# EAGLE board PCB_heater_mini_v1.0 (EAGLE 6.4)
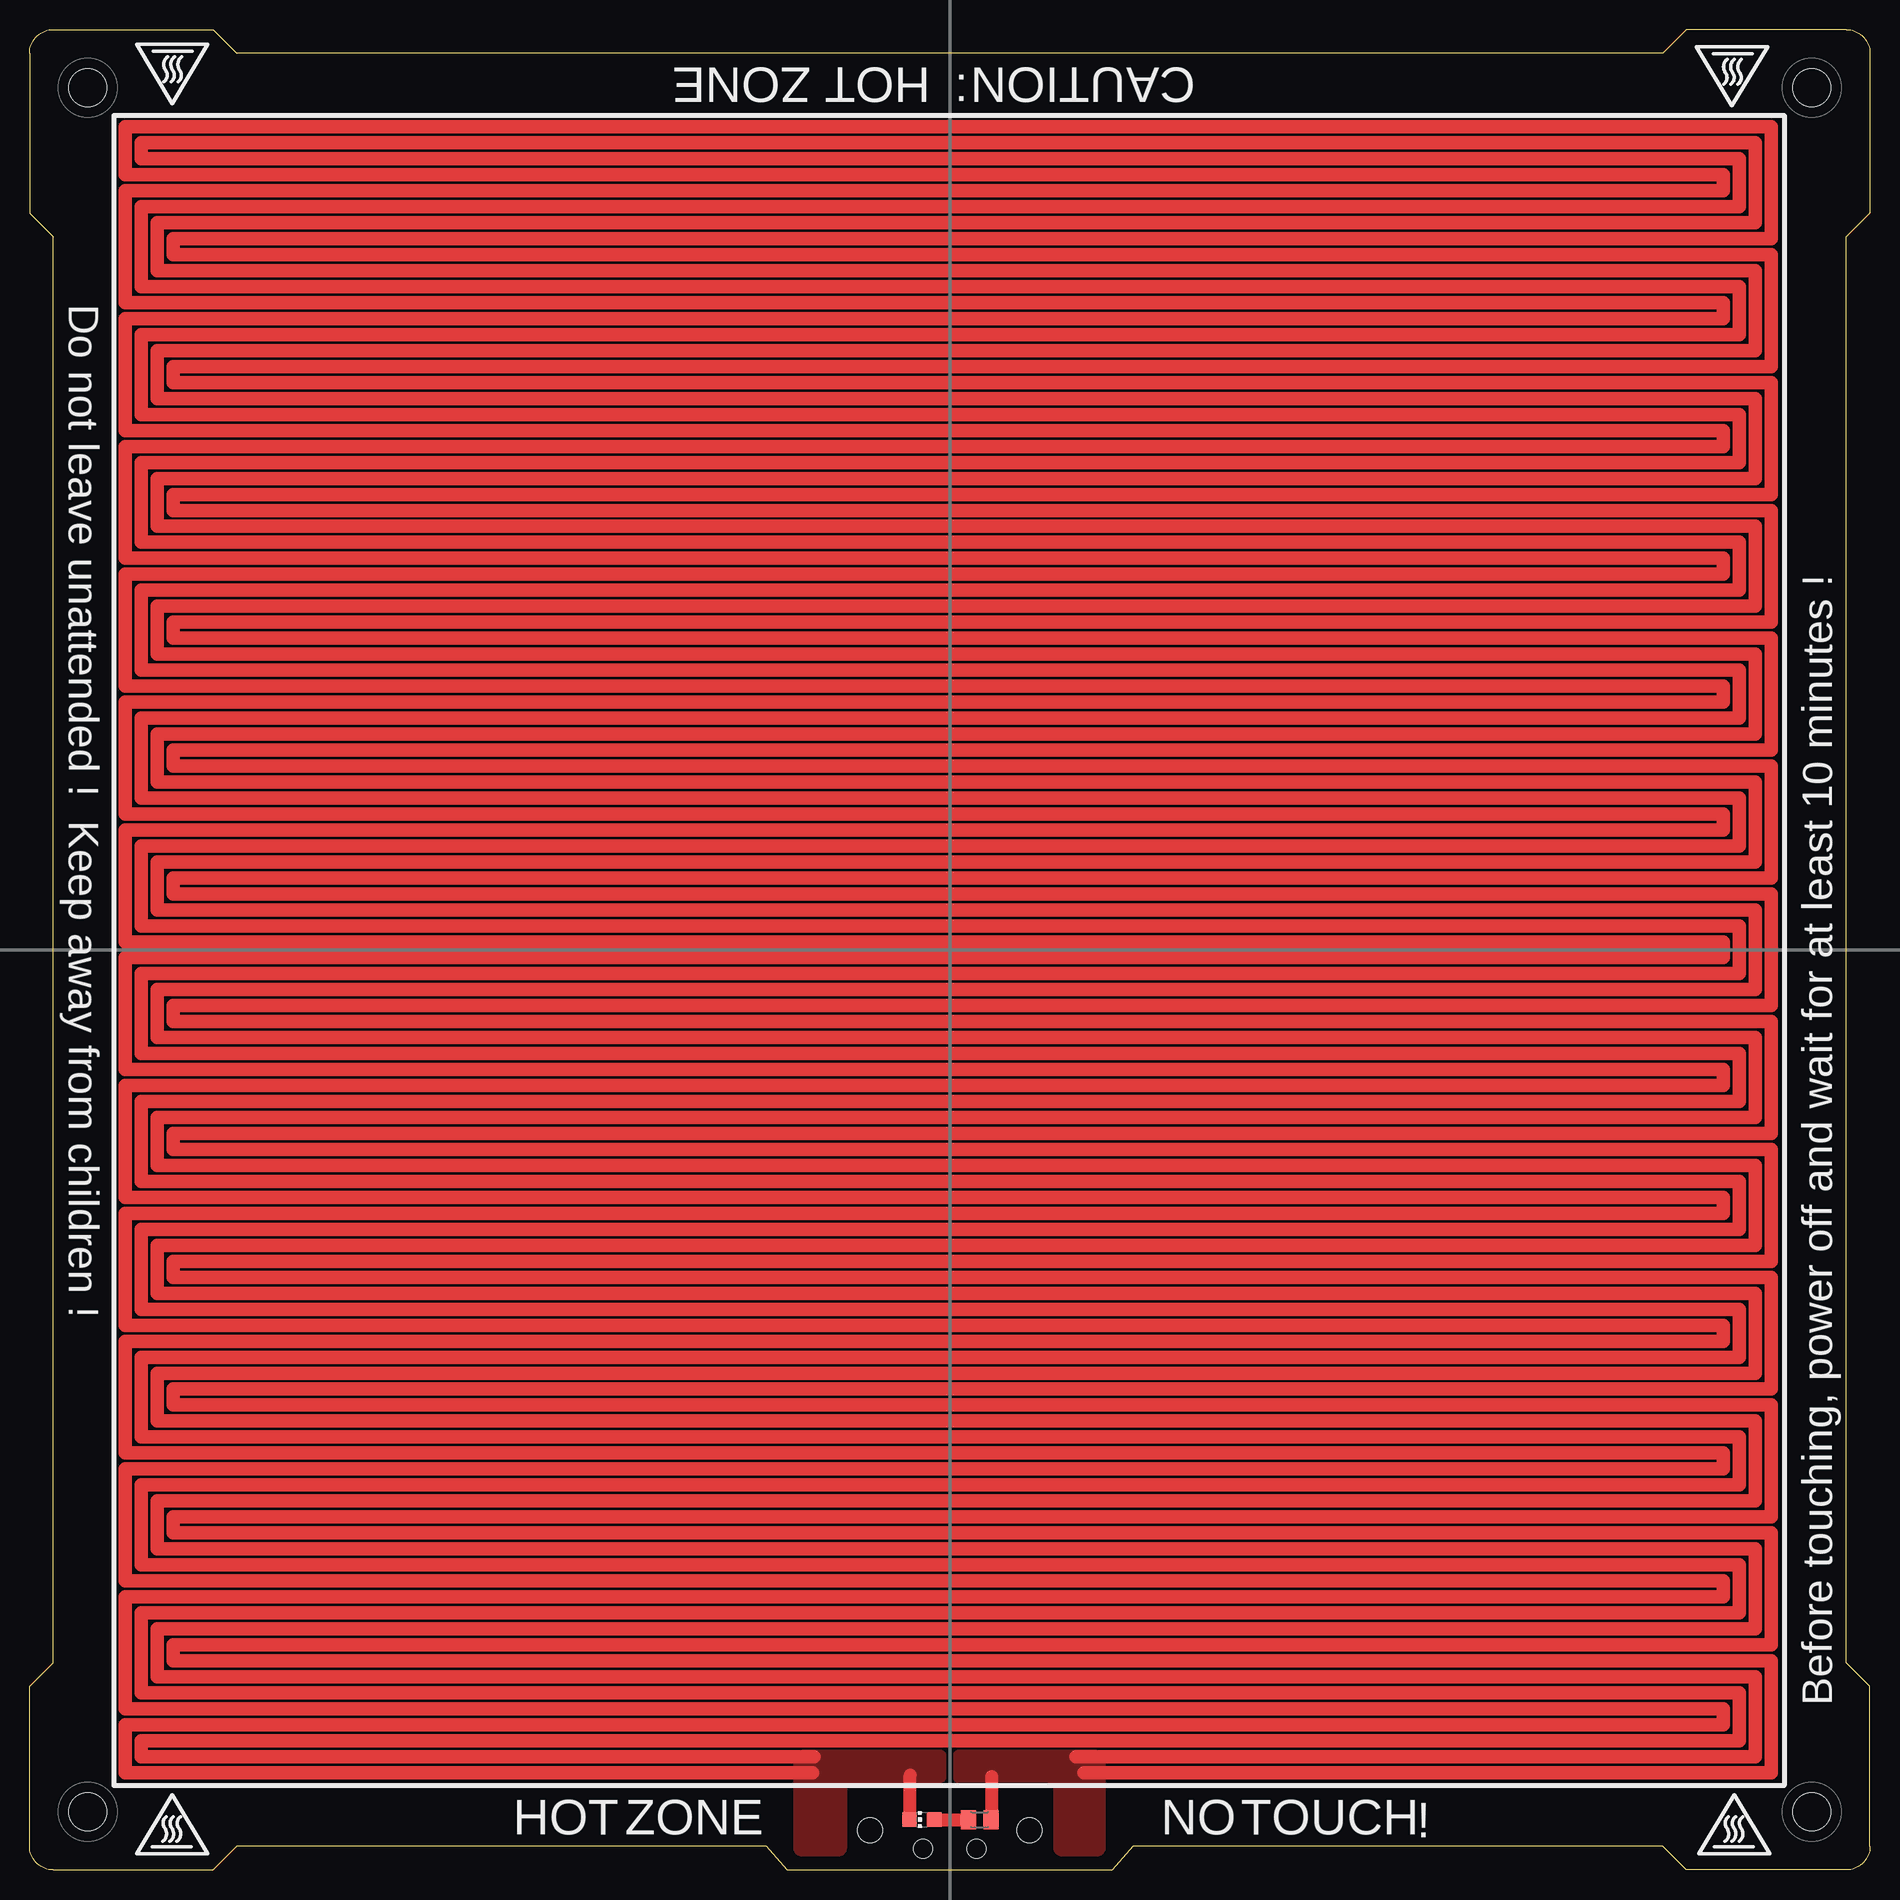
[diagram p0: board, top side]
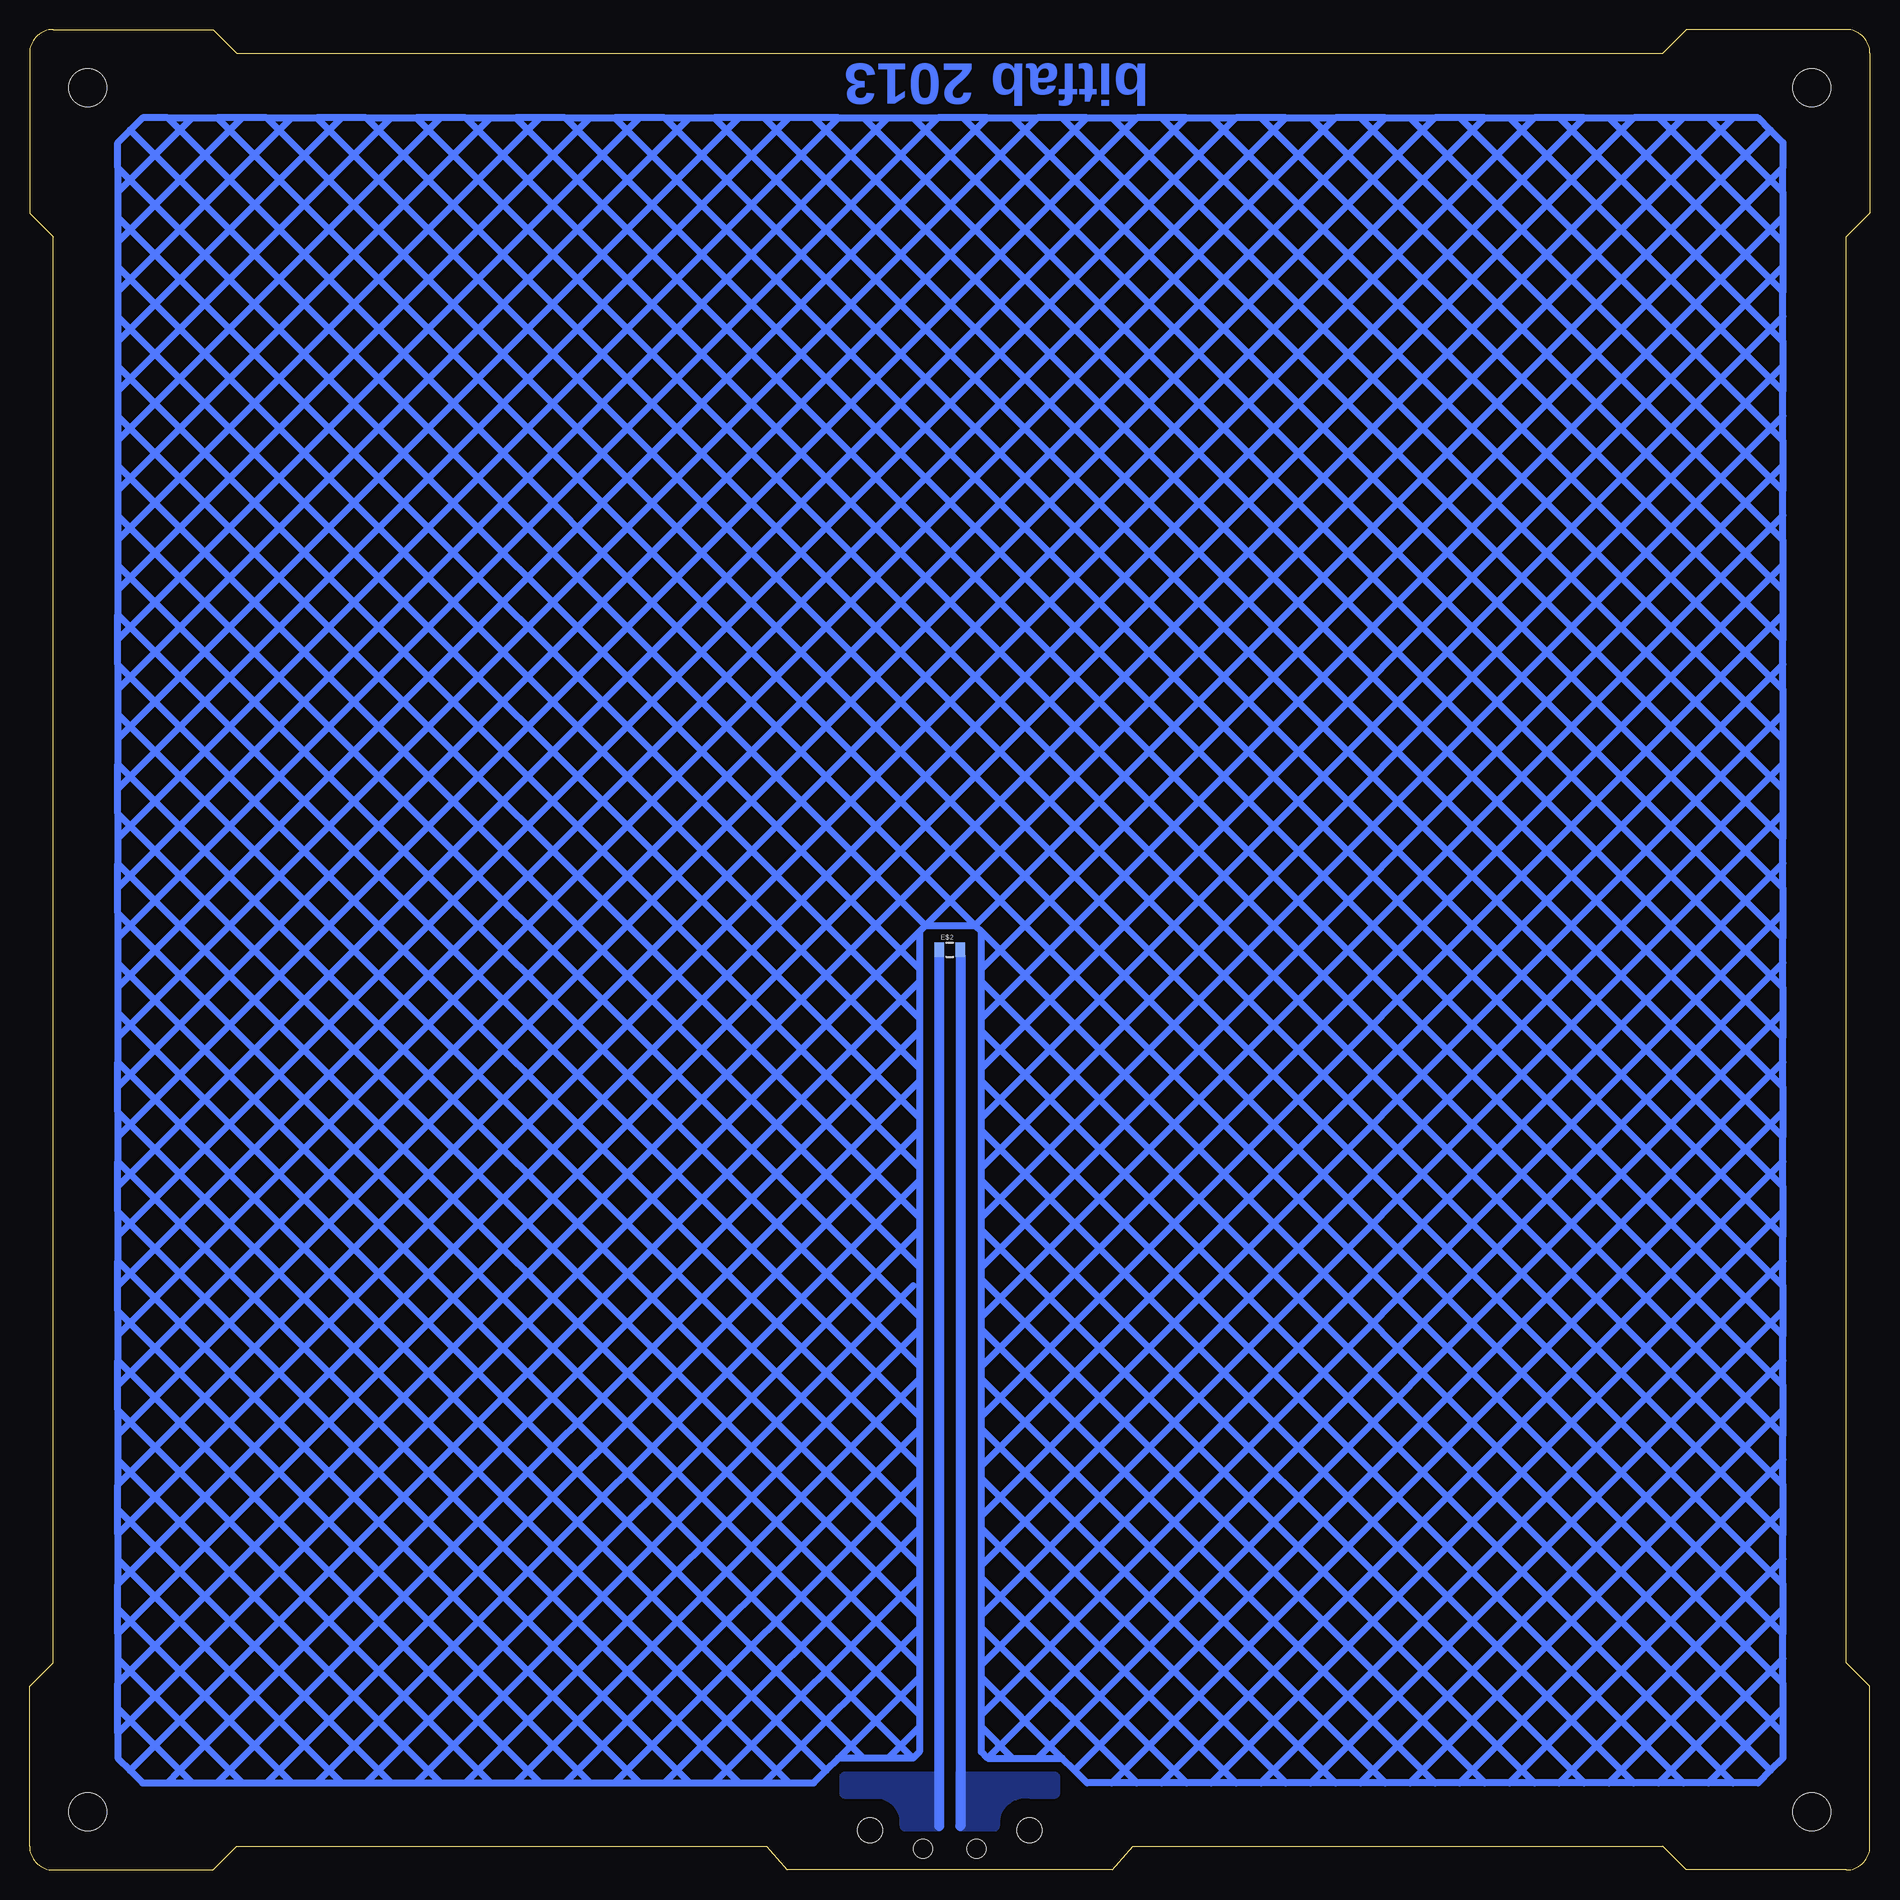
[diagram p1: board, bottom side, seen from below]

Size 155.5 x 155.5 mm. Coordinates in mm from the lower left corner, seen from the top.
Outline: 153.5,17.5 153.5,138 155.5,140 155.5,153.5 arc90 153.5,155.5 140,155.5 138,153.5 17.5,153.5 15.5,155.5 2,155.5 arc90 0,153.5 0,140 2,138 2,17.5 0,15.5 0,2 arc90 2,0 15.5,0 17.5,2 62.25,2 64,0 91.5,0 93.25,2 138,2 140,0 153.5,0 arc90 155.5,2 155.5,15.5 153.5,17.5
Copper layers (1*16): Top 0.035mm / dielectric 1.5mm / Bottom 0.035mm
Design rules "default": minimum track width 10mil, minimum drill 24mil, track to track 8mil, track to pad 8mil, pad to pad 8mil, via to via 8mil, smd to smd 8mil, copper to edge 20mil, drill to drill 8mil, minimum pad ring 10mil, minimum via ring 8mil, stop-mask expansion 4mil, vias tented up to drill 0mil, thermal gap 10mil
Holes 3.2 mm at 4.9,4.9 150.6,4.9 4.9,150.6 150.6,150.6
Holes 2.1 mm at 71,3.35 84.5,3.35
Holes 1.6 mm at 75.5,1.8 80,1.8

## Footprints (pad centres in the part's own frame; a part is rotated, then mirrored left to right if it is on the bottom)
M0805 = smd 1.3 x 1.6: 1 -0.95,0; 2 0.95,0
0805 = smd 0.8 x 1.2: 1 -0.9,0; 2 0.9,0
CHIP-LED0805 = smd 1.2 x 1.2: A 0,-1.05; C 0,1.05

## Placement (x,y rotation side)
1K  [M0805]  80.28,4.25 180 top
E$2  [0805]  77.75,77.75 0 bottom
LED1  [CHIP-LED0805]  75.39,4.25 90 top

## Library data of the parts
1K = resistor
E$2 = SparkFun
LED1 = led

## Nets
N$2: 1K.1

## Tracks (layer width: path | path; a pad name or v marks a point on that pad's centre or on a via)
S$1
  Top 1.1: 74.4,4.3 74.4,8 | 81.3,4.3 81.3,7.9
  Top 1.15: 89.1,8.22 147.15,8.22 147.15,17.68 12.15,17.68 12.15,19.02 147.15,19.02 147.15,28.48 12.15,28.48 12.15,29.82 147.15,29.82 147.15,39.27 12.15,39.27 12.15,40.62 147.15,40.62 147.15,50.08 12.15,50.08 12.15,51.42 147.15,51.42 147.15,60.88 12.15,60.88 12.15,62.23 147.15,62.23 147.15,71.67 12.15,71.67 12.15,73.03 147.15,73.03 147.15,82.47 12.15,82.47 12.15,83.83 147.15,83.83 147.15,93.28 12.15,93.28 12.15,94.62 147.15,94.62 147.15,104.08 12.15,104.08 12.15,105.42 147.15,105.42 147.15,114.88 12.15,114.88 12.15,116.22 147.15,116.22 147.15,125.67 12.15,125.67 12.15,127.03 147.15,127.03 147.15,136.47 12.15,136.47 12.15,137.82 147.15,137.82 147.15,147.28 8.1,147.28 8.1,143.22 143.1,143.22 143.1,141.88 8.1,141.88 8.1,132.43 143.1,132.43 143.1,131.07 8.1,131.07 8.1,121.62 143.1,121.62 143.1,120.28 8.1,120.28 8.1,110.83 143.1,110.83 143.1,109.47 8.1,109.47 8.1,100.03 143.1,100.03 143.1,98.67 8.1,98.67 8.1,89.22 143.1,89.22 143.1,87.88 8.1,87.88 8.1,78.42 143.1,78.42 143.1,77.08 8.1,77.08 8.1,67.62 143.1,67.62 143.1,66.28 8.1,66.28 8.1,56.83 143.1,56.83 143.1,55.48 8.1,55.48 8.1,46.02 143.1,46.02 143.1,44.67 8.1,44.67 8.1,35.23 143.1,35.23 143.1,33.88 8.1,33.88 8.1,24.43 143.1,24.43 143.1,23.07 8.1,23.07 8.1,13.62 143.1,13.62 143.1,12.28 8.1,12.28 8.1,8.22 66.15,8.22 | 88.42,9.57 145.8,9.57 145.8,16.32 10.8,16.32 10.8,20.38 145.8,20.38 145.8,27.12 10.8,27.12 10.8,31.18 145.8,31.18 145.8,37.92 10.8,37.92 10.8,41.98 145.8,41.98 145.8,48.73 10.8,48.73 10.8,52.77 145.8,52.77 145.8,59.52 10.8,59.52 10.8,63.58 145.8,63.58 145.8,70.33 10.8,70.33 10.8,74.38 145.8,74.38 145.8,81.12 10.8,81.12 10.8,85.17 145.8,85.17 145.8,91.92 10.8,91.92 10.8,95.97 145.8,95.97 145.8,102.72 10.8,102.72 10.8,106.78 145.8,106.78 145.8,113.53 10.8,113.53 10.8,117.58 145.8,117.58 145.8,124.33 10.8,124.33 10.8,128.38 145.8,128.38 145.8,135.12 10.8,135.12 10.8,139.18 145.8,139.18 145.8,145.93 9.45,145.93 9.45,144.57 144.45,144.57 144.45,140.53 9.45,140.53 9.45,133.78 144.45,133.78 144.45,129.72 9.45,129.72 9.45,122.97 144.45,122.97 144.45,118.92 9.45,118.92 9.45,112.17 144.45,112.17 144.45,108.12 9.45,108.12 9.45,101.38 144.45,101.38 144.45,97.33 9.45,97.33 9.45,90.58 144.45,90.58 144.45,86.53 9.45,86.53 9.45,79.78 144.45,79.78 144.45,75.72 9.45,75.72 9.45,68.97 144.45,68.97 144.45,64.92 9.45,64.92 9.45,58.17 144.45,58.17 144.45,54.12 9.45,54.12 9.45,47.38 144.45,47.38 144.45,43.33 9.45,43.33 9.45,36.58 144.45,36.58 144.45,32.52 9.45,32.52 9.45,25.77 144.45,25.77 144.45,21.73 9.45,21.73 9.45,14.97 144.45,14.97 144.45,10.93 9.45,10.93 9.45,9.57 66.28,9.57
  pour Top: 78.45,7.35 85.9,7.35 arc-90 86.5,6.85 86.5,1.85 arc90 87.3,1.15 90.2,1.15 arc90 90.9,1.85 90.9,9.26 arc90 89.9,10.15 78.6,10.15 arc90 78.05,9.71 78.05,7.85 arc90
  pour Top: 64.55,9.26 64.55,1.85 arc90 65.25,1.15 68.35,1.15 arc90 69.05,1.85 69.05,6.85 arc-90 69.45,7.35 76.85,7.35 arc90 77.45,7.85 77.45,9.66 arc90 76.85,10.15 65.45,10.15 arc90
S$3
  Bottom 0.85: 76.85,77.25 76.85,3.7
  pour Bottom: 77.25,8.3 77.25,3.75 arc-90 76.75,3.25 74.03,3.25 arc-90 73.53,3.75 73.53,4.25 arc90 70.97,6.03 68.92,6.03 arc-90 68.42,6.53 68.42,7.8 arc-90 68.92,8.3
S$4
  Bottom 0.85: 78.65,77.25 78.65,3.7
  pour Bottom: 78.25,8.05 78.25,3.75 arc90 78.75,3.25 81.47,3.25 arc90 81.97,3.75 81.97,4 arc-90 84,6.03 86.58,6.03 arc90 87.08,6.53 87.08,7.8 arc90 86.58,8.3 78.75,8.3 arc90
S$7
  Top 1.1: 76.6,4.25 79.1,4.25
S$11
  Bottom 0.6: 127.05,148.05 124.95,148.05 | 124.95,148.05 122.85,148.05 | 122.85,148.05 7.35,32.55 | 148.05,28.35 148.05,30.45 | 148.05,30.45 148.05,32.55 | 148.05,32.55 32.55,148.05 | 118.65,7.35 116.55,7.35 | 116.55,7.35 114.45,7.35 | 79.8,79.8 80.33,79.28 | 79.8,79.8 75.6,79.8 | 75.6,79.8 75.08,79.28 | 80.33,75.08 147,8.4 | 143.85,7.35 145.95,7.35 147,8.4 | 143.85,7.35 142.8,8.4 | 142.8,8.4 80.33,70.88 | 143.85,7.35 141.75,7.35 | 141.75,7.35 139.65,7.35 | 80.33,66.67 139.65,7.35 | 139.65,7.35 137.55,7.35 | 137.55,7.35 135.45,7.35 | 135.45,7.35 80.33,62.48 | 80.33,58.27 131.25,7.35 | 131.25,7.35 129.15,7.35 | 129.15,7.35 127.05,7.35 | 127.05,7.35 80.33,54.08 | 80.85,49.35 122.85,7.35 | 122.85,7.35 120.75,7.35 | 120.75,7.35 118.65,7.35 | 118.65,7.35 80.33,45.67 | 135.45,7.35 133.35,7.35 | 133.35,7.35 131.25,7.35 | 127.05,7.35 124.95,7.35 | 124.95,7.35 122.85,7.35 | 114.45,7.35 80.33,41.48 | 114.45,7.35 112.35,7.35 | 112.35,7.35 110.25,7.35 | 110.25,7.35 80.33,37.27 | 110.25,7.35 108.15,7.35 | 108.15,7.35 106.05,7.35 | 106.05,7.35 80.33,33.08 | 106.05,7.35 103.95,7.35 | 103.95,7.35 101.85,7.35 | 101.85,7.35 80.33,28.88 | 101.85,7.35 99.75,7.35 | 99.75,7.35 97.65,7.35 | 97.65,7.35 80.33,24.68 | 97.65,7.35 95.55,7.35 | 95.55,7.35 93.45,7.35 | 93.45,7.35 80.33,20.48 | 93.45,7.35 91.35,7.35 | 91.35,7.35 89.25,7.35 88.2,8.4 | 88.2,8.4 87.15,9.45 | 87.15,9.45 80.33,16.27 | 80.33,79.28 148.05,11.55 | 148.05,11.55 148.05,9.45 147,8.4 | 79.8,79.8 11.55,148.05 | 148.05,11.55 148.05,13.65 | 148.05,13.65 148.05,15.75 | 148.05,15.75 15.75,148.05 | 11.55,148.05 13.65,148.05 | 13.65,148.05 15.75,148.05 | 75.6,79.8 8.4,147 | 7.35,143.85 7.35,145.95 8.4,147 | 7.35,143.85 75.08,76.12 | 11.55,148.05 9.45,148.05 8.4,147
  Bottom 0.6: 15.75,148.05 17.85,148.05 | 17.85,148.05 19.95,148.05 | 19.95,148.05 148.05,19.95 | 148.05,19.95 148.05,17.85 | 148.05,17.85 148.05,15.75 | 148.05,19.95 148.05,22.05 | 148.05,22.05 148.05,24.15 | 148.05,24.15 24.15,148.05 | 24.15,148.05 22.05,148.05 | 22.05,148.05 19.95,148.05 | 24.15,148.05 26.25,148.05 | 26.25,148.05 28.35,148.05 | 28.35,148.05 148.05,28.35 | 148.05,28.35 148.05,26.25 | 148.05,26.25 148.05,24.15 | 32.55,148.05 30.45,148.05 | 30.45,148.05 28.35,148.05 | 32.55,148.05 34.65,148.05 | 34.65,148.05 36.75,148.05 | 36.75,148.05 148.05,36.75 | 148.05,36.75 148.05,34.65 | 148.05,34.65 148.05,32.55 | 75.6,79.8 143.85,148.05 | 143.85,148.05 141.75,148.05 | 141.75,148.05 139.65,148.05 | 139.65,148.05 7.35,15.75 | 7.35,15.75 7.35,17.85 | 7.35,17.85 7.35,19.95 | 7.35,19.95 135.45,148.05 | 135.45,148.05 137.55,148.05 | 137.55,148.05 139.65,148.05 | 143.85,148.05 145.95,148.05 147,147 | 147,147 79.8,79.8 | 75.08,79.28 7.35,11.55 | 7.35,11.55 7.35,9.45 8.4,8.4 | 8.4,8.4 75.08,75.08 | 80.33,76.12 148.05,143.85 | 148.05,143.85 148.05,145.95 147,147 | 148.05,143.85 148.05,141.75 | 148.05,141.75 148.05,139.65 | 148.05,139.65 80.33,71.92 | 148.05,139.65 148.05,137.55 | 148.05,137.55 148.05,135.45 | 148.05,135.45 80.33,67.72 | 148.05,135.45 148.05,133.35 | 148.05,133.35 148.05,131.25 | 148.05,131.25 80.33,63.52 | 148.05,131.25 148.05,129.15 | 148.05,129.15 148.05,127.05 | 148.05,127.05 80.33,59.33 | 148.05,127.05 148.05,124.95 | 148.05,124.95 148.05,122.85 | 148.05,122.85 80.33,55.12 | 148.05,122.85 148.05,120.75 | 148.05,120.75 148.05,118.65 | 148.05,118.65 80.33,50.92 | 148.05,118.65 148.05,116.55 | 148.05,116.55 148.05,114.45 | 148.05,114.45 80.33,46.73
  Bottom 0.6: 148.05,114.45 148.05,112.35 | 148.05,112.35 148.05,110.25 | 148.05,110.25 80.33,42.52 | 148.05,110.25 148.05,108.15 | 148.05,108.15 148.05,106.05 | 148.05,106.05 80.33,38.33 | 11.55,7.35 9.45,7.35 8.4,8.4 | 11.55,7.35 75.08,70.88 | 11.55,7.35 13.65,7.35 | 13.65,7.35 15.75,7.35 | 15.75,7.35 75.08,66.67 | 15.75,7.35 17.85,7.35 | 17.85,7.35 19.95,7.35 | 19.95,7.35 75.08,62.48 | 19.95,7.35 22.05,7.35 | 22.05,7.35 24.15,7.35 | 24.15,7.35 75.08,58.27 | 24.15,7.35 26.25,7.35 | 26.25,7.35 28.35,7.35 | 28.35,7.35 75.08,54.08 | 28.35,7.35 30.45,7.35 | 30.45,7.35 32.55,7.35 | 32.55,7.35 75.08,49.88 | 32.55,7.35 34.65,7.35 | 34.65,7.35 36.75,7.35 | 36.75,7.35 75.08,45.67 | 36.75,7.35 38.85,7.35 | 38.85,7.35 40.95,7.35 | 40.95,7.35 75.08,41.48 | 40.95,7.35 43.05,7.35 | 43.05,7.35 45.15,7.35 | 45.15,7.35 75.08,37.27 | 45.15,7.35 47.25,7.35 | 47.25,7.35 49.35,7.35 | 49.35,7.35 75.08,33.08 | 49.35,7.35 51.45,7.35 | 51.45,7.35 53.55,7.35 | 53.55,7.35 75.08,28.88 | 53.55,7.35 55.65,7.35 | 55.65,7.35 57.75,7.35 | 57.75,7.35 75.08,24.68 | 57.75,7.35 59.85,7.35 | 59.85,7.35 61.95,7.35 | 61.95,7.35 75.08,20.48 | 61.95,7.35 64.05,7.35 | 64.05,7.35 66.15,7.35 67.2,8.4 | 67.2,8.4 68.25,9.45 | 68.25,9.45 75.08,16.27 | 80.33,34.12 148.05,101.85 | 148.05,101.85 148.05,103.95 | 148.05,103.95 148.05,106.05 | 148.05,101.85 148.05,99.75 | 148.05,99.75 148.05,97.65 | 148.05,97.65 80.33,29.93 | 148.05,97.65 148.05,95.55 | 148.05,95.55 148.05,93.45 | 148.05,93.45 80.33,25.73 | 80.33,21.52 148.05,89.25 | 148.05,89.25 148.05,91.35 | 148.05,91.35 148.05,93.45 | 135.45,148.05 133.35,148.05 | 133.35,148.05 131.25,148.05 | 131.25,148.05 7.35,24.15 | 7.35,24.15 7.35,22.05 | 7.35,22.05 7.35,19.95 | 7.35,15.75 7.35,13.65
  Bottom 0.6: 7.35,13.65 7.35,11.55 | 7.35,24.15 7.35,26.25 | 7.35,26.25 7.35,28.35 | 7.35,28.35 127.05,148.05 | 127.05,148.05 129.15,148.05 | 129.15,148.05 131.25,148.05 | 7.35,32.55 7.35,30.45 | 7.35,30.45 7.35,28.35 | 7.35,32.55 7.35,34.65 | 7.35,34.65 7.35,36.75 | 7.35,36.75 118.65,148.05 | 118.65,148.05 120.75,148.05 | 120.75,148.05 122.85,148.05 | 118.65,148.05 116.55,148.05 | 116.55,148.05 114.45,148.05 | 114.45,148.05 7.35,40.95 | 7.35,40.95 7.35,38.85 | 7.35,38.85 7.35,36.75 | 7.35,40.95 7.35,43.05 | 7.35,43.05 7.35,45.15 | 7.35,45.15 110.25,148.05 | 110.25,148.05 112.35,148.05 | 112.35,148.05 114.45,148.05 | 110.25,148.05 108.15,148.05 | 108.15,148.05 106.05,148.05 | 106.05,148.05 7.35,49.35 | 7.35,49.35 7.35,47.25 | 7.35,47.25 7.35,45.15 | 7.35,49.35 7.35,51.45 | 7.35,51.45 7.35,53.55 | 7.35,53.55 101.85,148.05 | 101.85,148.05 103.95,148.05 | 103.95,148.05 106.05,148.05 | 101.85,148.05 99.75,148.05 | 99.75,148.05 97.65,148.05 | 97.65,148.05 7.35,57.75 | 7.35,57.75 7.35,55.65 | 7.35,55.65 7.35,53.55 | 7.35,57.75 7.35,59.85 | 7.35,59.85 7.35,61.95 | 7.35,61.95 93.45,148.05 | 93.45,148.05 95.55,148.05 | 95.55,148.05 97.65,148.05 | 148.05,89.25 148.05,87.15 | 148.05,87.15 148.05,85.05 | 148.05,85.05 80.33,17.32 | 80.33,13.12 148.05,80.85 | 148.05,80.85 148.05,82.95 | 148.05,82.95 148.05,85.05 | 148.05,80.85 148.05,78.75 | 148.05,78.75 148.05,76.65 | 148.05,76.65 80.85,9.45 | 148.05,76.65 148.05,74.55 | 148.05,74.55 148.05,72.45 | 148.05,72.45 85.05,9.45 | 148.05,72.45 148.05,70.35 | 148.05,70.35 148.05,68.25 | 148.05,68.25 88.2,8.4 | 91.35,7.35 148.05,64.05 | 148.05,64.05 148.05,66.15 | 148.05,66.15 148.05,68.25 | 148.05,64.05 148.05,61.95 | 148.05,61.95 148.05,59.85
  Bottom 0.6: 148.05,59.85 95.55,7.35 | 99.75,7.35 148.05,55.65 | 148.05,55.65 148.05,57.75 | 148.05,57.75 148.05,59.85 | 148.05,55.65 148.05,53.55 | 148.05,53.55 148.05,51.45 | 148.05,51.45 103.95,7.35 | 108.15,7.35 148.05,47.25 | 148.05,47.25 148.05,49.35 | 148.05,49.35 148.05,51.45 | 148.05,47.25 148.05,45.15 | 148.05,45.15 148.05,43.05 | 148.05,43.05 112.35,7.35 | 116.55,7.35 148.05,38.85 | 148.05,38.85 148.05,40.95 | 148.05,40.95 148.05,43.05 | 120.75,7.35 148.05,34.65 | 124.95,7.35 148.05,30.45 | 129.15,7.35 148.05,26.25 | 133.35,7.35 148.05,22.05 | 137.55,7.35 148.05,17.85 | 142.8,8.4 148.05,13.65 | 142.8,8.4 141.75,7.35 | 148.05,40.95 40.95,148.05 | 40.95,148.05 38.85,148.05 | 38.85,148.05 36.75,148.05 | 40.95,148.05 43.05,148.05 | 43.05,148.05 45.15,148.05 | 45.15,148.05 148.05,45.15 | 148.05,49.35 49.35,148.05 | 49.35,148.05 47.25,148.05 | 47.25,148.05 45.15,148.05 | 49.35,148.05 51.45,148.05 | 51.45,148.05 53.55,148.05 | 53.55,148.05 148.05,53.55 | 148.05,57.75 57.75,148.05 | 57.75,148.05 55.65,148.05 | 55.65,148.05 53.55,148.05 | 57.75,148.05 59.85,148.05 | 59.85,148.05 61.95,148.05 | 61.95,148.05 148.05,61.95 | 148.05,66.15 66.15,148.05 | 66.15,148.05 64.05,148.05 | 64.05,148.05 61.95,148.05 | 66.15,148.05 68.25,148.05 | 68.25,148.05 70.35,148.05 | 70.35,148.05 148.05,70.35 | 148.05,74.55 74.55,148.05 | 74.55,148.05 72.45,148.05 | 72.45,148.05 70.35,148.05 | 74.55,148.05 76.65,148.05 | 76.65,148.05 78.75,148.05 | 78.75,148.05 148.05,78.75 | 148.05,82.95 82.95,148.05 | 82.95,148.05 80.85,148.05 | 80.85,148.05 78.75,148.05 | 148.05,87.15 87.15,148.05 | 87.15,148.05 85.05,148.05 | 85.05,148.05 82.95,148.05 | 87.15,148.05 89.25,148.05 | 89.25,148.05 91.35,148.05
  Bottom 0.6: 91.35,148.05 148.05,91.35 | 148.05,95.55 95.55,148.05 | 91.35,148.05 93.45,148.05 | 99.75,148.05 148.05,99.75 | 148.05,103.95 103.95,148.05 | 108.15,148.05 148.05,108.15 | 148.05,112.35 112.35,148.05 | 116.55,148.05 148.05,116.55 | 148.05,120.75 120.75,148.05 | 124.95,148.05 148.05,124.95 | 148.05,129.15 129.15,148.05 | 133.35,148.05 148.05,133.35 | 148.05,137.55 137.55,148.05 | 141.75,148.05 148.05,141.75 | 89.25,148.05 7.35,66.15 | 7.35,66.15 7.35,64.05 | 7.35,64.05 7.35,61.95 | 7.35,66.15 7.35,68.25 | 7.35,68.25 7.35,70.35 | 7.35,70.35 85.05,148.05 | 80.85,148.05 7.35,74.55 | 7.35,74.55 7.35,72.45 | 7.35,72.45 7.35,70.35 | 7.35,74.55 7.35,76.65 | 7.35,76.65 7.35,78.75 | 7.35,78.75 76.65,148.05 | 72.45,148.05 7.35,82.95 | 7.35,82.95 7.35,80.85 | 7.35,80.85 7.35,78.75 | 7.35,82.95 7.35,85.05 | 7.35,85.05 7.35,87.15 | 7.35,87.15 68.25,148.05 | 64.05,148.05 7.35,91.35 | 7.35,91.35 7.35,89.25 | 7.35,89.25 7.35,87.15 | 59.85,148.05 7.35,95.55 | 7.35,95.55 7.35,93.45 | 7.35,93.45 7.35,91.35 | 55.65,148.05 7.35,99.75 | 7.35,99.75 7.35,97.65 | 7.35,97.65 7.35,95.55 | 7.35,99.75 7.35,101.85 | 7.35,101.85 7.35,103.95 | 7.35,103.95 51.45,148.05 | 47.25,148.05 7.35,108.15 | 7.35,108.15 7.35,106.05 | 7.35,106.05 7.35,103.95 | 43.05,148.05 7.35,112.35 | 7.35,112.35 7.35,110.25 | 7.35,110.25 7.35,108.15 | 7.35,112.35 7.35,114.45 | 7.35,114.45 7.35,116.55 | 7.35,116.55 38.85,148.05 | 34.65,148.05 7.35,120.75 | 7.35,120.75 7.35,118.65 | 7.35,118.65 7.35,116.55 | 7.35,120.75 7.35,122.85 | 7.35,122.85 7.35,124.95 | 7.35,124.95 30.45,148.05 | 26.25,148.05 7.35,129.15 | 7.35,129.15 7.35,127.05 | 7.35,127.05 7.35,124.95 | 7.35,129.15 7.35,131.25 | 7.35,131.25 7.35,133.35 | 7.35,133.35 22.05,148.05
  Bottom 0.6: 17.85,148.05 7.35,137.55 | 7.35,137.55 7.35,135.45 | 7.35,135.45 7.35,133.35 | 13.65,148.05 7.35,141.75 | 7.35,141.75 7.35,139.65 | 7.35,139.65 7.35,137.55 | 7.35,141.75 7.35,143.85 | 7.35,139.65 75.08,71.92 | 75.08,67.72 7.35,135.45 | 7.35,131.25 75.08,63.52 | 75.08,59.33 7.35,127.05 | 7.35,122.85 75.08,55.12 | 75.08,50.92 7.35,118.65 | 7.35,114.45 75.08,46.73 | 75.08,42.52 7.35,110.25 | 7.35,106.05 75.08,38.33 | 75.08,34.12 7.35,101.85 | 7.35,97.65 75.08,29.93 | 75.08,25.73 7.35,93.45 | 7.35,89.25 75.08,21.52 | 75.08,17.32 7.35,85.05 | 7.35,80.85 75.08,13.12 | 7.35,76.65 74.55,9.45 | 7.35,72.45 70.35,9.45 | 7.35,68.25 67.2,8.4 | 7.35,64.05 64.05,7.35 | 7.35,59.85 59.85,7.35 | 7.35,55.65 55.65,7.35 | 7.35,51.45 51.45,7.35 | 7.35,47.25 47.25,7.35 | 7.35,43.05 43.05,7.35 | 7.35,38.85 38.85,7.35 | 7.35,34.65 34.65,7.35 | 7.35,30.45 30.45,7.35 | 7.35,26.25 26.25,7.35 | 7.35,22.05 22.05,7.35 | 7.35,17.85 17.85,7.35 | 7.35,13.65 13.65,7.35 | 75.08,12.07 75.08,9.97 74.55,9.45 | 75.08,12.07 75.08,13.12 | 75.08,13.12 75.08,16.27 | 75.08,16.27 75.08,17.32 | 75.08,17.32 75.08,20.48 | 75.08,20.48 75.08,21.52 | 75.08,21.52 75.08,24.68 | 75.08,24.68 75.08,25.73 | 75.08,25.73 75.08,28.88 | 75.08,28.88 75.08,29.93 | 75.08,29.93 75.08,33.08 | 75.08,33.08 75.08,34.12 | 75.08,34.12 75.08,37.27 | 75.08,37.27 75.08,38.33 | 75.08,38.33 75.08,41.48 | 75.08,41.48 75.08,42.52 | 75.08,42.52 75.08,45.67 | 75.08,45.67 75.08,46.73 | 75.08,46.73 75.08,49.88 | 75.08,49.88 75.08,50.92 | 75.08,50.92 75.08,54.08 | 75.08,54.08 75.08,55.12 | 75.08,55.12 75.08,58.27 | 75.08,58.27 75.08,59.33 | 75.08,59.33 75.08,62.48 | 75.08,62.48 75.08,63.52 | 75.08,63.52 75.08,66.67 | 75.08,66.67 75.08,67.72 | 75.08,67.72 75.08,70.88
  Bottom 0.6: 75.08,70.88 75.08,71.92 | 75.08,71.92 75.08,75.08 | 75.08,75.08 75.08,76.12 | 75.08,76.12 75.08,79.28 | 80.33,79.28 80.33,76.12 | 80.33,76.12 80.33,75.08 | 80.33,75.08 80.33,71.92 | 80.33,71.92 80.33,70.88 | 80.33,70.88 80.33,67.72 | 80.33,67.72 80.33,66.67 | 80.33,66.67 80.33,63.52 | 80.33,63.52 80.33,62.48 | 80.33,62.48 80.33,59.33 | 80.33,59.33 80.33,58.27 | 80.33,58.27 80.33,55.12 | 80.33,55.12 80.33,54.08 | 80.33,54.08 80.33,50.92 | 80.33,50.92 80.33,46.73 | 80.33,46.73 80.33,45.67 | 80.33,45.67 80.33,42.52 | 80.33,42.52 80.33,41.48 | 80.33,41.48 80.33,38.33 | 80.33,38.33 80.33,37.27 | 80.33,37.27 80.33,34.12 | 80.33,34.12 80.33,33.08 | 80.33,33.08 80.33,29.93 | 80.33,29.93 80.33,28.88 | 80.33,28.88 80.33,25.73 | 80.33,25.73 80.33,24.68 | 80.33,24.68 80.33,21.52 | 80.33,21.52 80.33,20.48 | 80.33,20.48 80.33,17.32 | 80.33,17.32 80.33,16.27 | 80.33,16.27 80.33,13.12 | 80.33,13.12 80.33,12.07 | 80.33,12.07 80.33,9.97 80.85,9.45 | 148.05,38.85 148.05,36.75 | 75.08,12.07 72.45,9.45 | 80.33,12.07 82.95,9.45 | 74.55,9.45 68.25,9.45 | 80.85,9.45 87.15,9.45

## Text on the board
Bottom: bitfab 2013
tPlace: HOT ZONE | : | CAUTION | Do not leave unattended ! Keep away from children ! | Before touching, power off and wait for at least 10 minutes ! | HOT | ZONE | NO | TOUCH | !
tStop: - | +
bStop: thermistor | heater | DC12V